# Altium PCB 2寸屏幕转接板.PcbDoc
Units mil, origin at the board's own origin, x right, y up, seen from the top; angles counter-clockwise.
Board outline 1674.8 x 1674.8 mil, 2 copper layers (Top Layer, Bottom Layer), stack 60.28 mil thick; 7 components, 16 nets, 52 pads, 216 vias.
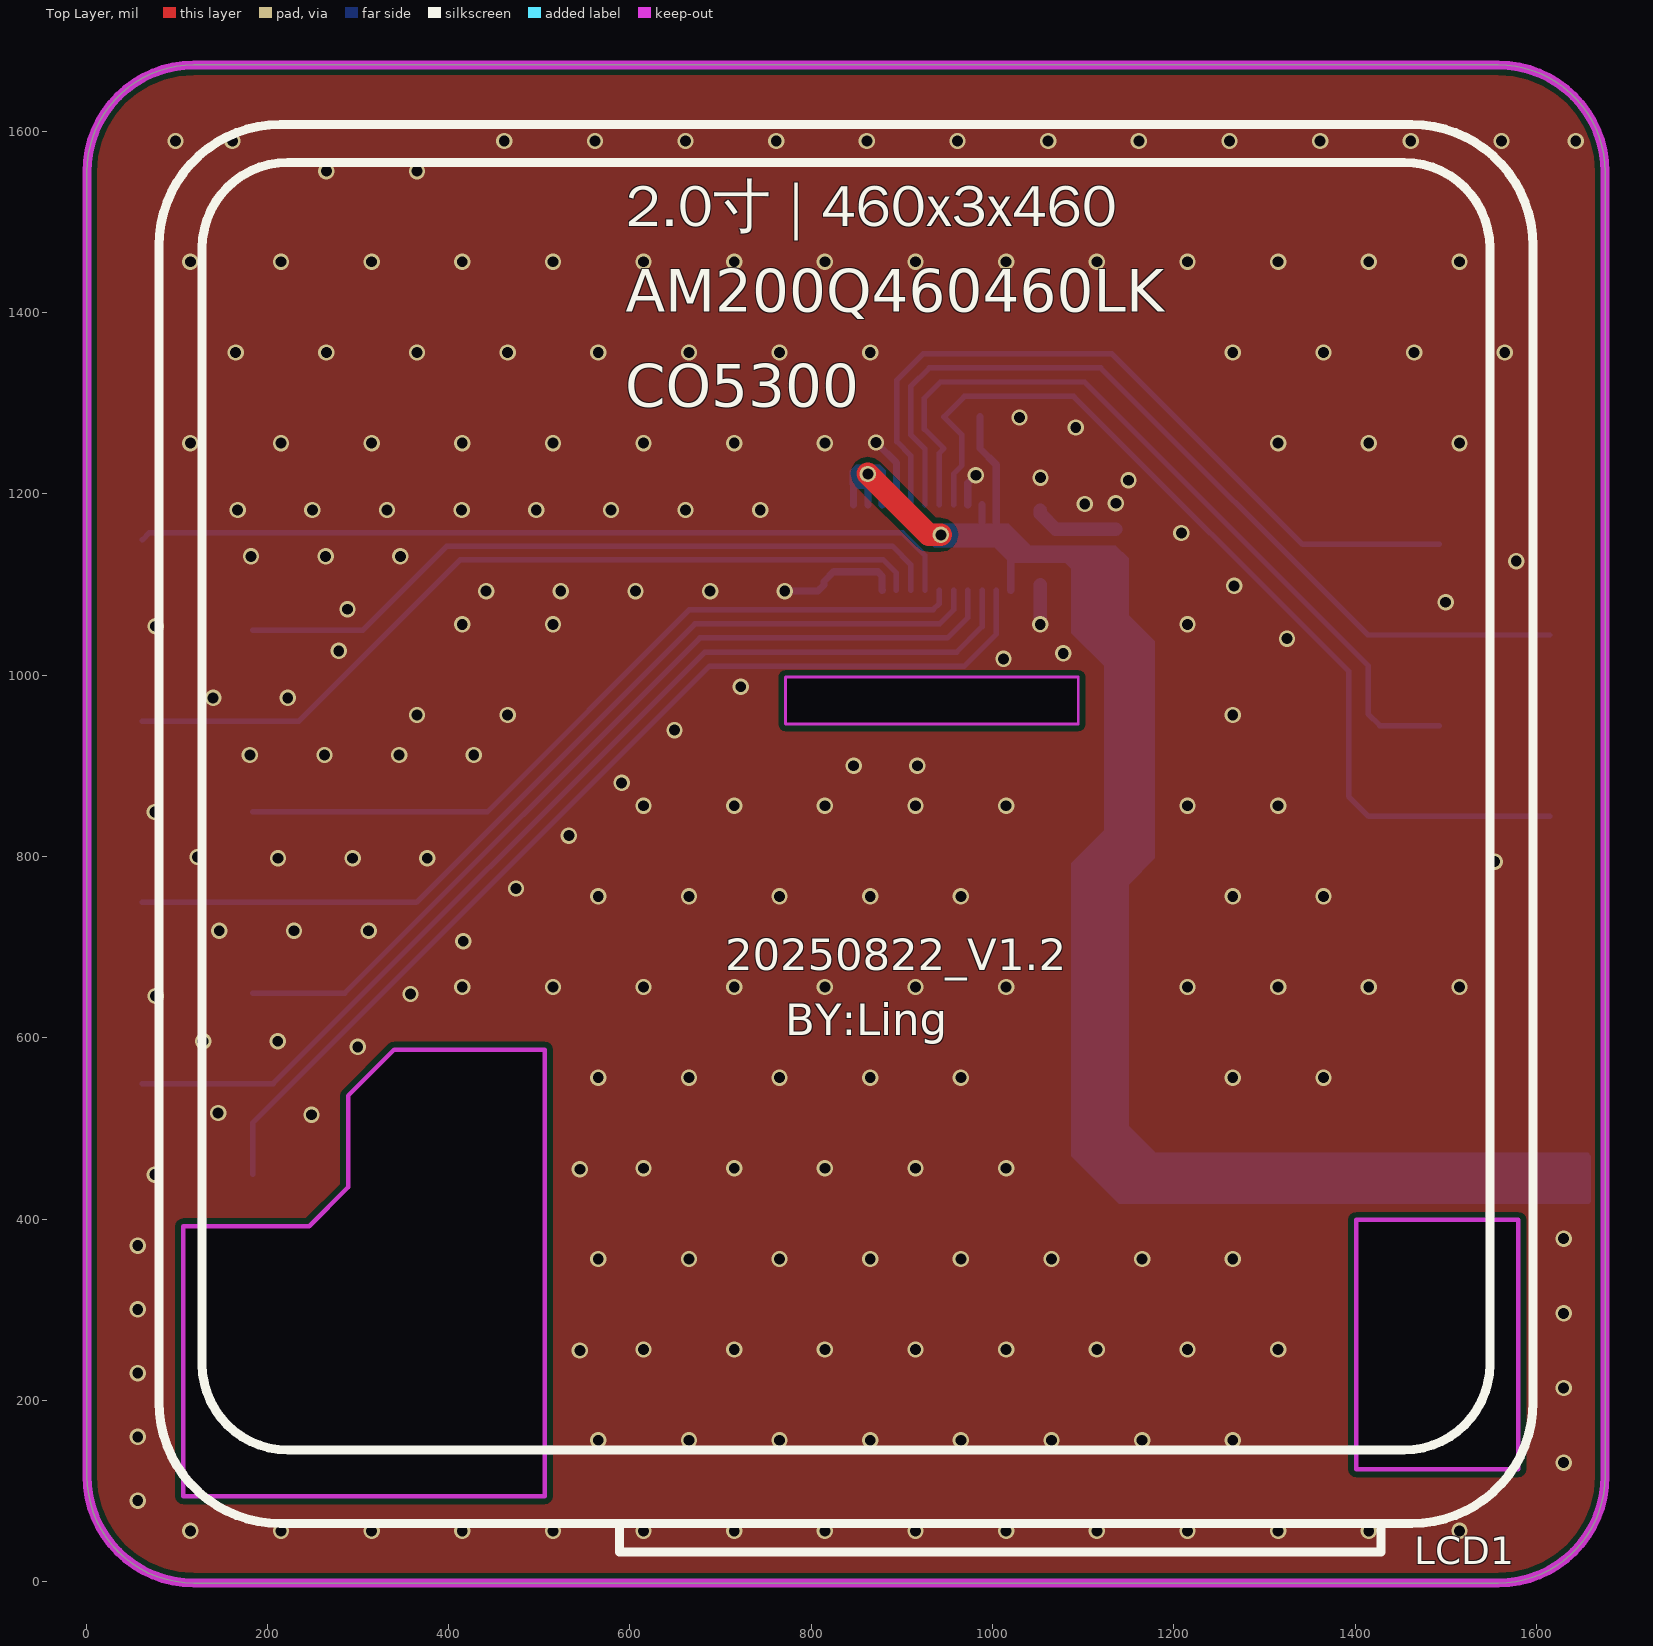
[diagram p0: Top Layer view]
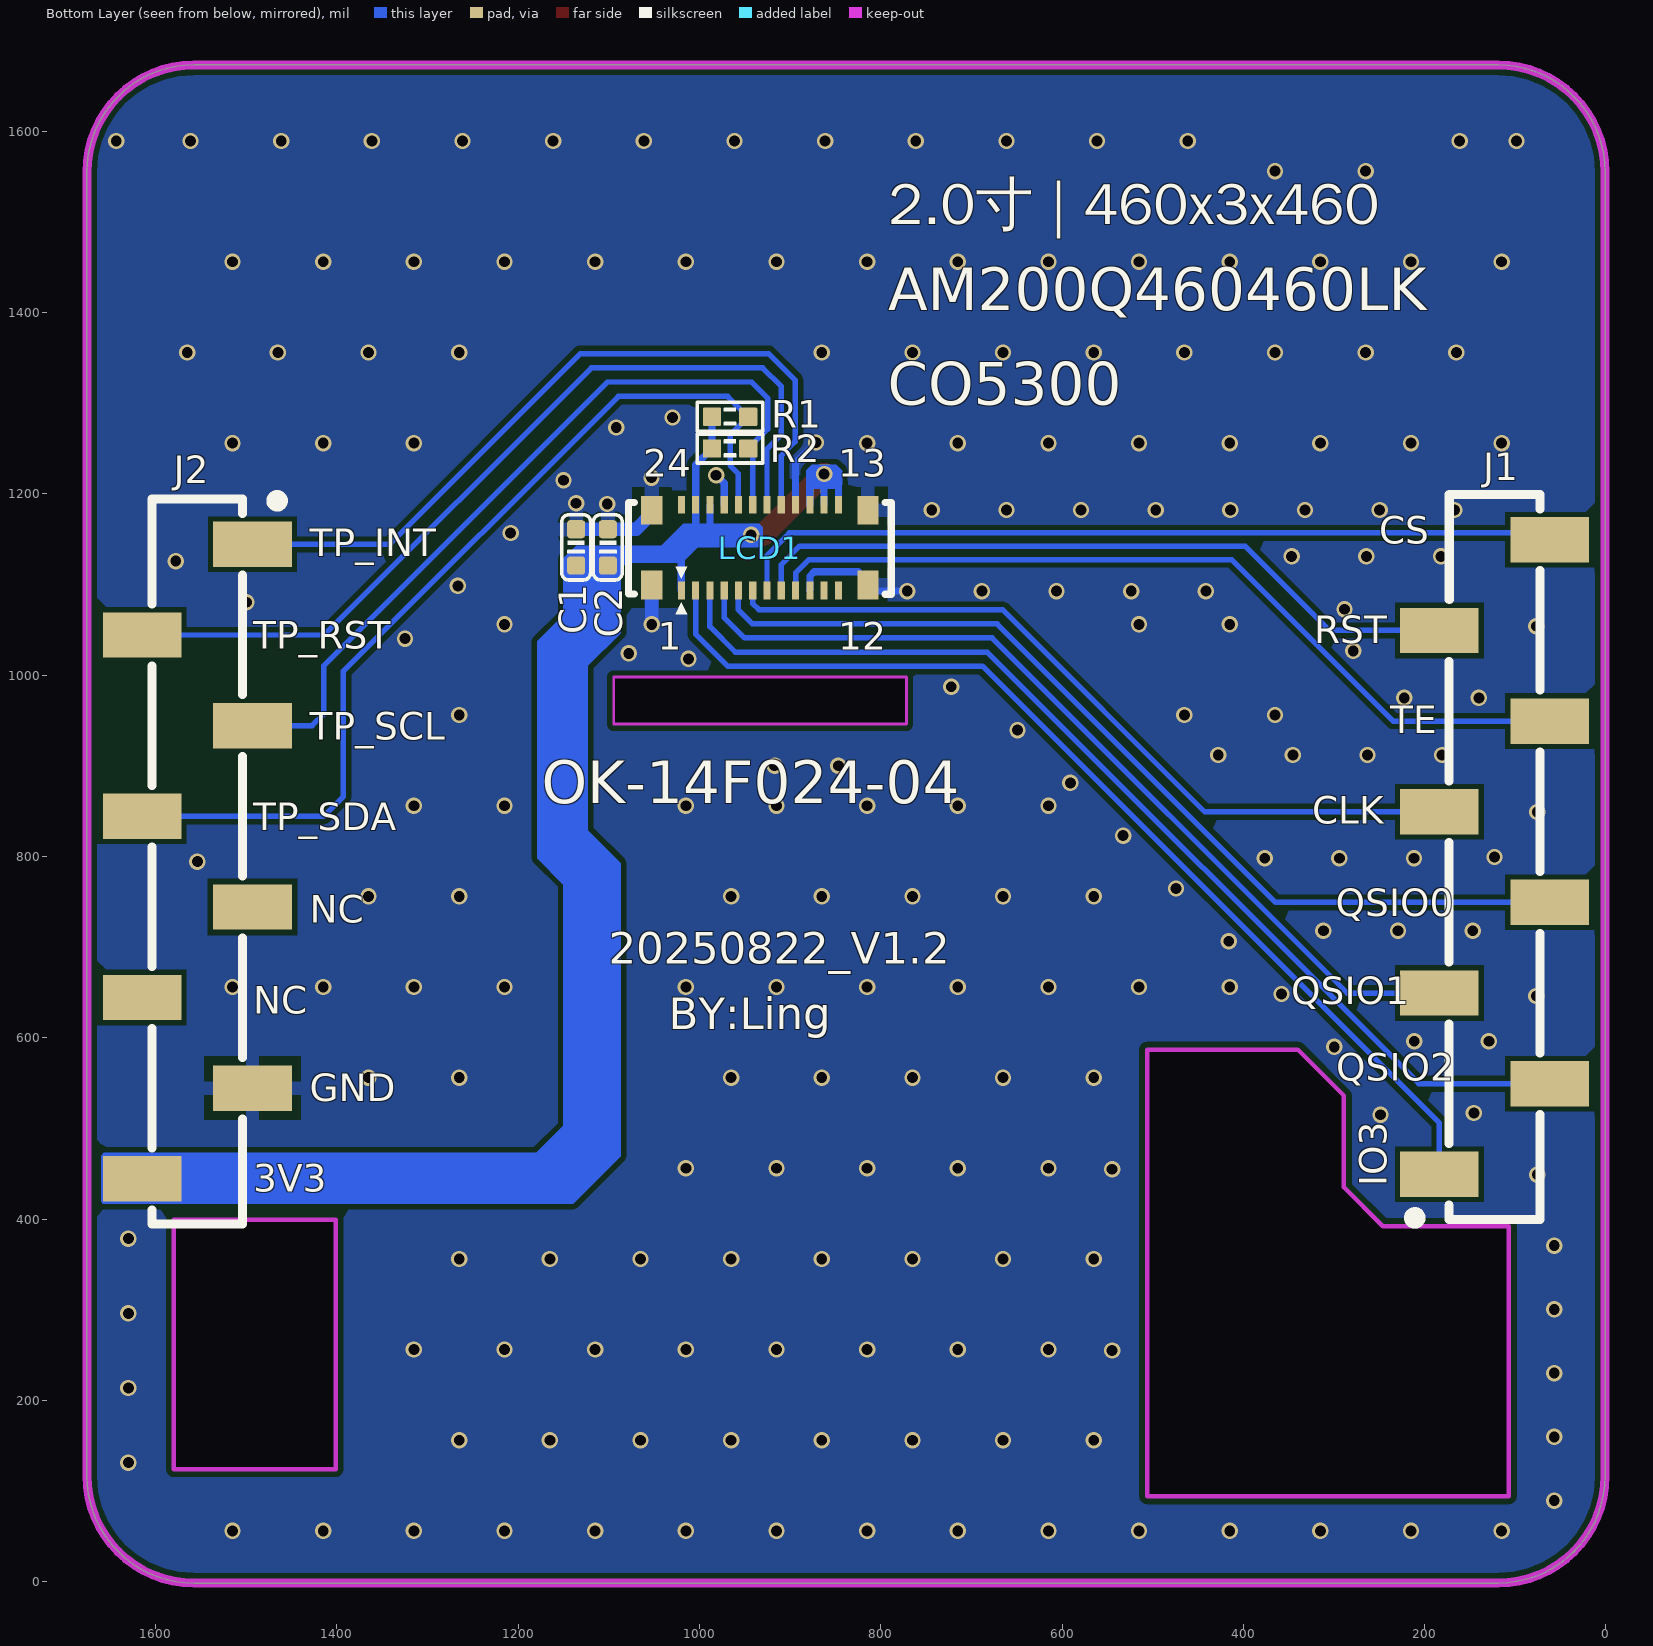
[diagram p1: Bottom Layer view, seen from below]
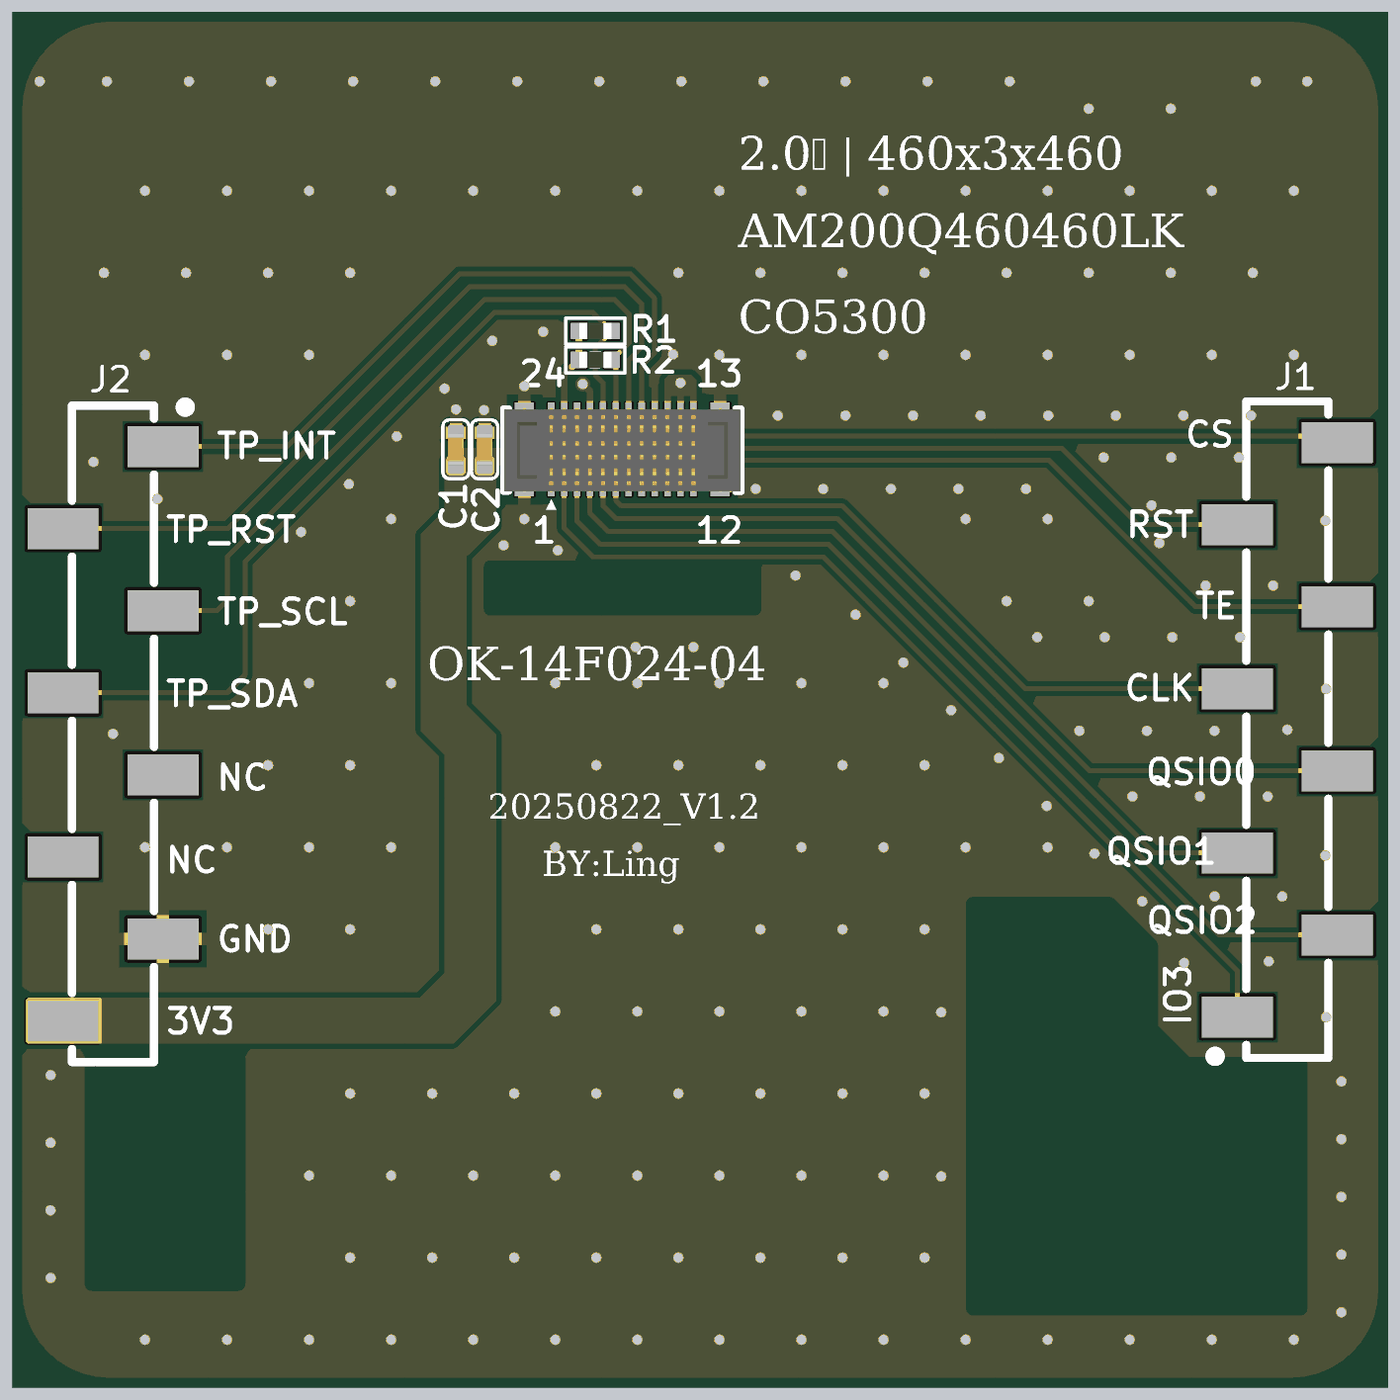
[diagram p2: 3D render of the assembled board from below, using the file's embedded part models]

## Layer stack, top to bottom
Top Solder: solder mask 0.4, Solder Resist, Dk 3.5
Top Layer: signal copper 1.4
Dielectric 1: dielectric 57.48, FR-4, Dk 4.8
Bottom Layer: signal copper 1.4
Bottom Solder: solder mask 0.4, Solder Resist, Dk 3.5

## Board outline
0.89,116.51 0.89,1555.09 cw(c119,1555.09) 119,1673.2 1557.58,1673.2 cw(c1557.58,1555.09) 1675.69,1555.09 1675.69,116.51 cw(c1557.58,116.51) 1557.58,-1.6 119,-1.6 cw(c119,116.51)
cut-out: 107,94 107,392 246,392 289,435 289,536 340,587 506,587 506,94
cut-out: 1401.13,124 1580,124 1580,399 1401.13,399
cut-out: 771.5,946 1094.5,946 1094.5,998 771.5,998

## Design rules (kind name [scope] priority, off if disabled: settings)
Clearance [All] p1: gap=6 ignorepadtopadclearanceinfootprint=TRUE except(0: Arc-Hole Track-Hole SMDPad-Hole THPad-Hole Via-Hole Fill-Hole Poly-Hole Region-Hole Text-Hole)
ComponentClearance [All] p1: gap=0 collisioncheckmode=3 verticalgap=0 showdistances=FALSE
HoleToHoleClearance [All] p1: gap=4 allowstackedmicrovias=TRUE
MinimumSolderMaskSliver [All] p1: minsoldermaskwidth=0
PlaneConnect [All] p1: pad.planeconnectstyle=Relief pad.reliefexpansion=20 pad.reliefentries=4 pad.reliefconductorwidth=10 pad.reliefairgap=10 via.planeconnectstyle=Direct via.reliefexpansion=20 via.reliefentries=4 via.reliefconductorwidth=10 via.reliefairgap=10
PolygonConnect [All] p1: thpad.connectstyle=Relief thpad.reliefconductorwidth=10 thpad.reliefentries=4 thpad.polygonreliefangle="90 Angle" thpad.airgapwidth=10 smdpad.connectstyle=Relief smdpad.reliefconductorwidth=15 smdpad.reliefentries=4 smdpad.polygonreliefangle="90 Angle" smdpad.airgapwidth=10 via.connectstyle=Direct via.reliefconductorwidth=10 via.reliefentries=4 via.polygonreliefangle="90 Angle" via.airgapwidth=10
RoutingVias [All] p1: holewidth=28 width=50 viastyle="Through Hole" minholewidth=11 minwidth=18 maxholewidth=28 maxwidth=50
SilkToSilkClearance [All] p1: silktosilkclearance=0
SilkToSolderMaskClearance [IsPad] p1: minsilkscreentomaskgap=0 clearancetoexposedcopper=TRUE
SolderMaskExpansion [All] p1: expansion=4 istentingtop=FALSE
Width [All] p1: maxlimit=50 minlimit=6 preferedwidth=6
24 further rules are at their usual default settings.

## Components (designator, comment, footprint, x,y, rotation, side; value= is the part's Value field where it differs from the comment)
C1 "0.1uF" "CAP_0402 - G" 1136,1141 r90 bottom
C2 "10uF" "CAP_0402 - G" 1101,1141 r90 bottom
J1 "Pin HDR1X8" HDR-SMD_8P-P2.54-V-M-LS4.8_XKB_R1 122.89,799.32 r90 bottom locked
J2 "Pin HDR1X8" HDR-SMD_8P-P2.54-V-M-LS4.8_XKB_R1 1553.89,794.32 r270 bottom locked
LCD1 "AM200Q460460LK" 2寸AMOLED 838.29,835.8 r0 top locked
R1 "4.7K" "RES_0402 -G" 966.17,1285 r0 bottom
R2 "4.7K" "RES_0402 -G" 966.17,1250.01 r0 bottom

## Footprints (in the part's own frame and the unit in brackets; to place one, negate y for a bottom-side part, rotate by r counter-clockwise, add the part's x,y. Pads: shape width x height; smd on the part's side, far side on the other; paste and mask are expansions set on the pad)
2寸AMOLED [mm]
  rect 0.2x0.5 smd far side paste+0 mask+0.05: 1(4.613,6.547) 2(4.213,6.547) 3(3.813,6.547) 4(3.413,6.547) 5(3.013,6.547) 6(2.613,6.547) 7(2.213,6.547) 8(1.813,6.547) 9(1.413,6.547) 10(1.013,6.547) 11(0.613,6.547) 12(0.213,6.547) 13(0.213,8.947) 14(0.613,8.947) 15(1.013,8.947) 16(1.413,8.947) 17(1.813,8.947) 18(2.213,8.947) 19(2.613,8.947) 20(3.013,8.947) 21(3.413,8.947) 22(3.813,8.947) 23(4.213,8.947) 24(4.613,8.947)
  rect 0.6x0.8 smd far side paste+0 mask+0.05: 25(-0.617,6.697) 26(-0.617,8.797) 27(5.443,8.797) 28(5.443,6.697)
  silkscreen extent -19.25,-20.4 19.25,19.6, body extent -19.25,-20.9 19.25,19.6, height 2.3
"CAP_0402 - G" [mil]
  rrect35% 20x20 smd mask+2: 1(-20,0) 2(20,0)
  silkscreen extent -36,-16 36,16, body extent -20,-10 20,10, height 20
HDR-SMD_8P-P2.54-V-M-LS4.8_XKB_R1 [mm]
  rect 1.27x2.2 smd: 1(-8.89,1.546) 2(-6.35,-1.546) 3(-3.81,1.546) 4(-1.27,-1.546) 5(1.27,1.546) 6(3.81,-1.546) 7(6.35,1.546) 8(8.89,-1.546)
  silkscreen extent -10.26,-1.27 10.16,2.39, body extent -10.16,-2.4 10.16,2.4, height 9.15
"RES_0402 -G" [mil]
  rrect10% 20x20 smd mask+2: 1(-20,0) 2(20,0)
  silkscreen extent -36,-16 36,16, body extent -20,-10 20,10, height 14

## Part data
C1 C2: library part CAP, "Capacitor"
LCD1: "2.0寸AMOLED 460*460"
R1 R2: library part Res2, "Resistor"

## Via types
v1: diameter 18, hole 12, Top Layer to Bottom Layer, tented both sides, 216 vias

## Nets (pads, with @x,y where several pads share a name; then routed paths per layer and width w, separated by ;. In a path a pad name is that pad's centre, name@x,y a point inside that pad or via, vN(x,y) a via of type N, cw(c..) or ccw(c..) an arc to the next point about the centre after c; other vN are vias at no path point)
GND: C1.2 C2.2 J2.7 LCD1.10 LCD1.16 LCD1.21 LCD1.25 LCD1.26 LCD1.27 LCD1.28 | length 388.3
  Bottom Layer w8: v1(770.73,1092.73) 807.26,1092.73 LCD1.25 814,1103.4 824.6,1114 873.43,1114 878.11,1109.31 878.11,1093.62 LCD1.10 ; v1(871.33,1256.75) 893.92,1234.17 LCD1.16 ; LCD1.21 972.67,1211.67 v1(981.5,1220.5)
  Bottom Layer w15: v1(1052.59,1056) LCD1.28 ; LCD1.27 1052.59,1178.2 1069.79,1161 C2.2 C1.2
  other v1: 115,56 215,56 315,56 415,56 515,56 615,56 715,56 815,56 915,56 1015,56 1115,56 1215,56 1315,56 1415,56 1515,56 57,89.38 1630,131.29 565,156 665,156 765,156 865,156 965,156 1065,156 1165,156 1265,156 57,159.71 1630,213.65 57,230.03 544.68,255 615,256 715,256 815,256 915,256 1015,256 1115,256 1215,256 1315,256 1630,296 57,300.35 565,356 665,356 765,356 865,356 965,356 1065,356 1165,356 1265,356 57,370.68 1630,378.35 75.68,449 544.68,455 615,456 715,456 815,456 915,456 1015,456 248.65,515 145.65,517 565,556 665,556 765,556 865,556 965,556 1265,556 1365,556 299.65,590 129.11,596.11 211.46,596.11 76.68,646 357.88,648.23 415,656 515,656 615,656 715,656 815,656 915,656 1015,656 1215,656 1315,656 1415,656 1515,656 416.11,706.47 146.94,718 229.29,718 311.65,718 565,756 665,756 765,756 865,756 965,756 1265,756 1365,756 474.34,764.7 1553.89,794.32 211.65,798 294,798 376.35,798 122.89,799.32 532.58,822.93 75.68,849 615,856 715,856 815,856 915,856 1015,856 1215,856 1315,856 590.81,881.16 846.68,900 917,900 180.65,912 263,912 345.35,912 427.71,912 649.04,939.4 365,956 465,956 1265,956 140.14,974.92 222.49,974.92 722.23,987.23 1012,1018 1078,1024 278.77,1026.77 1324.7,1040.3 76.68,1054 415,1056 515,1056 1215,1056 288.41,1072.77 1499.81,1080.39 441.31,1092.73 523.67,1092.73 606.02,1092.73 688.37,1092.73 1266.47,1098.53 1577.73,1125.73 181.94,1131 264.29,1131 346.65,1131 1208.23,1156.77 167.2,1182.14 249.55,1182.14 331.9,1182.14 414.26,1182.14 496.61,1182.14 578.97,1182.14 661.32,1182.14 743.67,1182.14 1101.73,1188.73 1135.94,1189.6 1150,1215 1052.82,1217.89 115,1256 215,1256 315,1256 415,1256 515,1256 615,1256 715,1256 815,1256 1315,1256 1415,1256 1515,1256 1091.77,1273.23 1029.77,1284.23 165,1356 265,1356 365,1356 465,1356 565,1356 665,1356 765,1356 865,1356 1265,1356 1365,1356 1465,1356 1565,1356 115,1456 215,1456 315,1456 415,1456 515,1456 615,1456 715,1456 815,1456 915,1456 1015,1456 1115,1456 1215,1456 1315,1456 1415,1456 1515,1456 265,1556 365,1556 98.68,1589.32 161.32,1589.32 461.32,1589.32 561.32,1589.32 661.32,1589.32 761.32,1589.32 861.32,1589.32 961.32,1589.32 1061.32,1589.32 1161.32,1589.32 1261.32,1589.32 1361.32,1589.32 1461.32,1589.32 1561.32,1589.32 1643.32,1589.32
GPIO38: J2.5
GPIO47: J2.6
LCDRST_GPIO10: J1.7 LCD1.8 | length 801.2
  Bottom Layer w6: J1.7 305.11,1049.32 398.02,1142.22 889.37,1142.22 909.67,1121.93 LCD1.8
LCDTE_GPIO11: J1.6 LCD1.9 | length 931
  Bottom Layer w6: J1.6 234.75,949.32 412.97,1127.54 879.14,1127.54 893.92,1112.76 LCD1.9
QS_CLK_GPIO12: J1.5 LCD1.6 | length 867.1
  Bottom Layer w6: J1.5 442.64,849.32 665.51,1072.18 934.34,1072.18 941.17,1079.01 LCD1.6
QS_CS_GPIO9: J1.8 LCD1.7 | length 915.5
  Bottom Layer w6: J1.8 69.61,1156.91 900.77,1156.91 925.42,1132.26 LCD1.7
QS_IO0_GPIO13: J1.4 LCD1.5 | length 1050.1
  Bottom Layer w6: J1.4 364.35,749.32 671.64,1056.61 941.58,1056.61 956.92,1071.94 LCD1.5
QS_IO1_GPIO14: J1.3 LCD1.4 | length 990.5
  Bottom Layer w6: J1.3 285.34,649.32 677.06,1041.04 950.2,1041.04 972.67,1063.51 LCD1.4
QS_IO2_GPIO15: J1.2 LCD1.3 | length 1175.3
  Bottom Layer w6: J1.2 206.33,549.32 682.48,1025.47 960.47,1025.47 988.41,1053.41 LCD1.3
QS_IO3_GPIO16: J1.1 LCD1.2 | length 1148.7
  Bottom Layer w6: J1.1 183.76,505.76 687.9,1009.9 968.9,1009.9 1004.16,1045.16 LCD1.2
TP_INT_GPIO42: J2.1 LCD1.17 | length 841.8
  Bottom Layer w6: LCD1.17 909.67,1242.3 894.29,1257.67 894.29,1325.35 923.74,1354.8 1131.43,1354.8 1341.91,1144.32 J2.1
TP_RST_GPIO41: J2.2 LCD1.18 | length 972.5
  Bottom Layer w6: LCD1.18 925.42,1249.73 909.95,1265.19 909.95,1318.87 930.16,1339.08 1119.15,1339.08 1413.91,1044.32 J2.2
TP_SCL_GPIO40: J2.3 LCD1.19 R2.1 | length 892.5
  Bottom Layer w6: LCD1.19 941.17,1245.01 R2.1 924.67,1271.5 924.67,1305.54 942.49,1323.37 1101.59,1323.37 1414.36,1010.59 1414.36,957.22 1427.26,944.32 J2.3
TP_SDA_GPIO39: J2.4 LCD1.20 R1.1 | length 1059.8
  Bottom Layer w6: LCD1.20 956.92,1222.08 966.17,1231.33 966.17,1265 R1.1 968.82,1307.65 1089.43,1307.65 1392.71,1004.37 1392.71,866.31 1414.71,844.32 J2.4
VCC3V3: C1.1 C2.1 J2.8 LCD1.1 LCD1.13 LCD1.14 LCD1.15 LCD1.22 LCD1.23 R1.2 R2.2 | length 414.9
  Top Layer w25: v1(862.43,1222) 929.7,1154.73 v1(942.98,1154.73)
  Bottom Layer w8: LCD1.13 846.68,1212.01 ; LCD1.14 v1(862.43,1222) ; LCD1.15 878.18,1216.82 ; R1.2 R2.2 1004.16,1232.02 LCD1.23 1004.16,1152.59 ; 988.41,1152.59 LCD1.22 ; LCD1.1 1019.91,1138.06
pads on no net: LCD1.11 LCD1.12 LCD1.24

## Polygon pours and split planes (outlines as drawn)
GND on Bottom Layer "GND_L02_P000" (solid, remove dead copper, pour order 0): 0.89,116.51 0.89,1555.09 cw(c119,1555.09) 119,1673.2 1557.58,1673.2 cw(c1557.58,1555.09) 1675.69,1555.09 1675.69,116.51 cw(c1557.58,116.51) 1557.58,-1.6 119,-1.6 cw(c119,116.51)
GND on Top Layer "GND_L01_P001" (solid, remove dead copper, pour order 1): 0.89,116.51 0.89,1555.09 cw(c119,1555.09) 119,1673.2 1557.58,1673.2 cw(c1557.58,1555.09) 1675.69,1555.09 1675.69,116.51 cw(c1557.58,116.51) 1557.58,-1.6 119,-1.6 cw(c119,116.51)

## Keep-outs
Keep-Out Layer:
  lines w3: 771.5,946 1094.5,946 1094.5,998 771.5,998 771.5,946
  lines w5: 107,94 506,94 506,587 340,587 289,536 289,435 246,392 107,392 107,94 ; 1401.13,124 1580,124 1580,399 1401.13,399 1401.13,124
  lines w10: 0.89,116.51 ccw(c119,116.51) 119,-1.6 1557.58,-1.6 ccw(c1557.58,116.51) 1675.69,116.51 1675.69,1555.09 ccw(c1557.58,1555.09) 1557.58,1673.2 119,1673.2 ccw(c119,1555.09) 0.89,1555.09 0.89,116.51

## Other copper
Bottom Layer:
  region net VCC3V3: 846.62,1205.9 842.62,1209.9 842.62,1225.62 849,1232 875.97,1232 882.14,1225.83 882.14,1210.06 877.97,1205.9
  region net VCC3V3: 1080,1124 1019,1124 1002,1141 935,1141 930,1146 930,1163 934,1167 1018,1167 1042,1143 1136,1143 1150,1129 1150,1066.35 1179,1037.35 1179,798 1150,769 1150,503 1180,473 1657,473 1660,470 1660,419 1658,417 1138.98,417 1086.67,469.31 1086.67,792.67 1123,829 1123,1010.14 1086.67,1046.26 1086.67,1117.33

## Silkscreen, mask and mechanical layers (free items; w line width, h text height)
Top Overlay:
  text "2.0寸 | 460x3x460" at 595.06,1479.83 h80
  text "AM200Q460460LK" at 595.06,1385.3 h80
  text "CO5300" at 595,1280.67 h80
  text "20250822_V1.2" at 705,663 h60
  text "BY:Ling" at 771,591 h60
Bottom Overlay:
  text "2.0寸 | 460x3x460" at 791.94,1481.83 h80
  text "AM200Q460460LK" at 791.94,1387.3 h80
  text "CO5300" at 792,1282.67 h80
  text "13" at 847,1219 h30
  text "24" at 1062,1219 h30
  text "CS" at 250,1145 h30
  text "TP_INT" at 1430,1131 h30
  text "RST" at 322,1035 h30
  text "TP_RST" at 1492,1029 h30
  text "12" at 847,1028 h30
  text "1" at 1046,1028 h30
  text "TE" at 238,936 h30
  text "TP_SCL" at 1430,929 h30
  text "OK-14F024-04" at 1174,843 h80
  text "CLK" at 324,836 h30
  text "TP_SDA" at 1492,829 h30
  text "QSIO0" at 298,733.76 h30
  text "NC" at 1430,727 h30
  text "20250822_V1.2" at 1100,670 h60
  text "QSIO1" at 347,636.86 h30
  text "NC" at 1492,626.33 h30
  text "BY:Ling" at 1034,598 h60
  text "QSIO2" at 297.29,552.72 h30
  text "GND" at 1430,530 h30
  text "IO3" at 242,436 h30 r270
  text "3V3" at 1492,430 h30